# Allegro board QUADCOPTER1brd3_1.brd
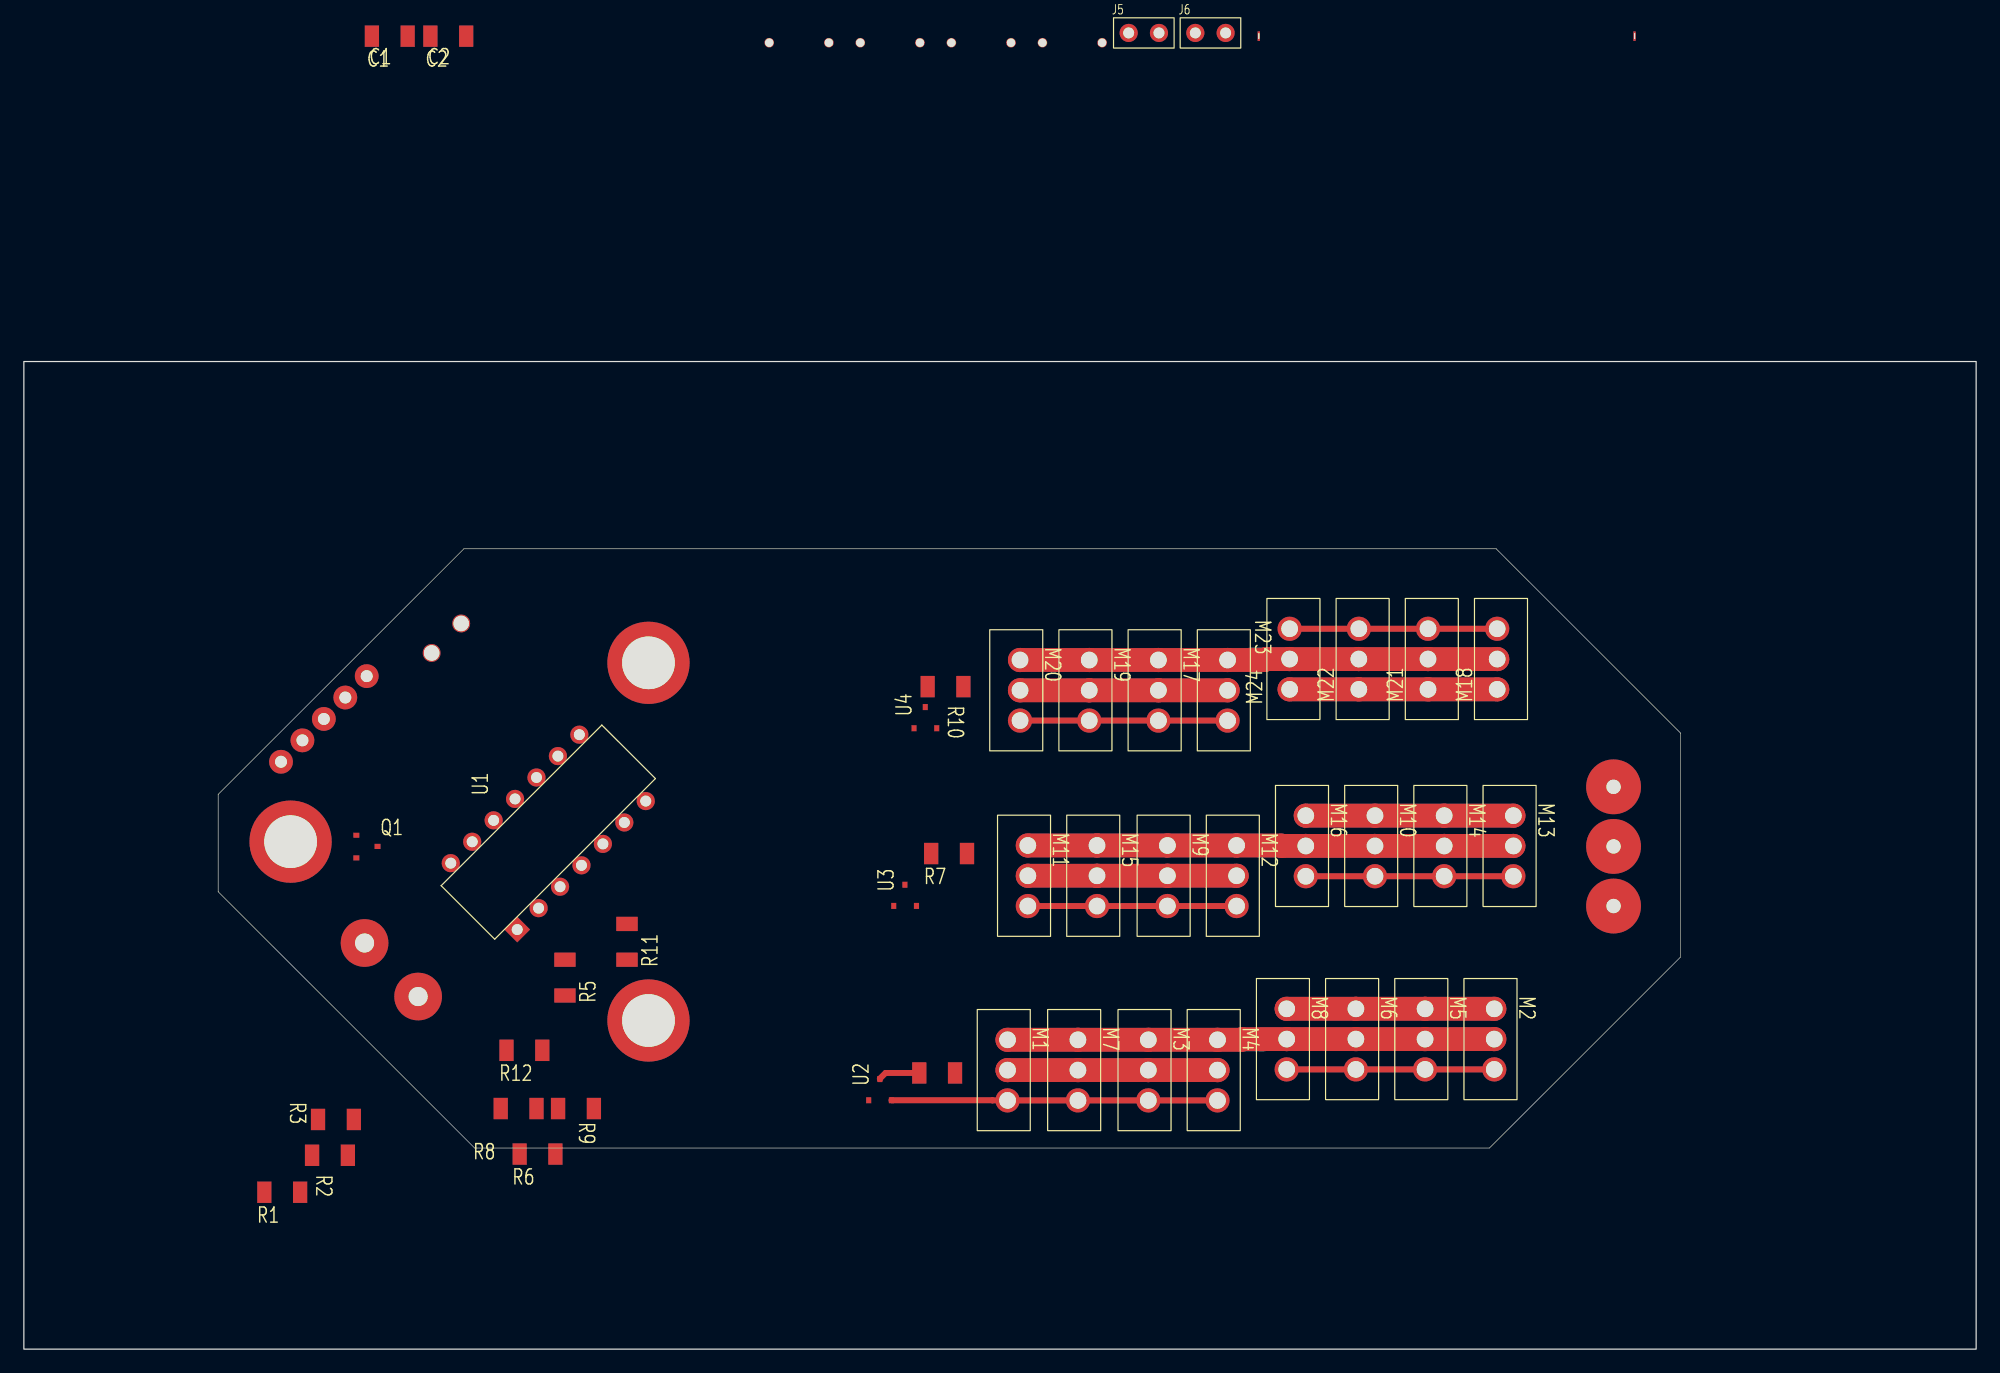
[diagram p0: board, top side]
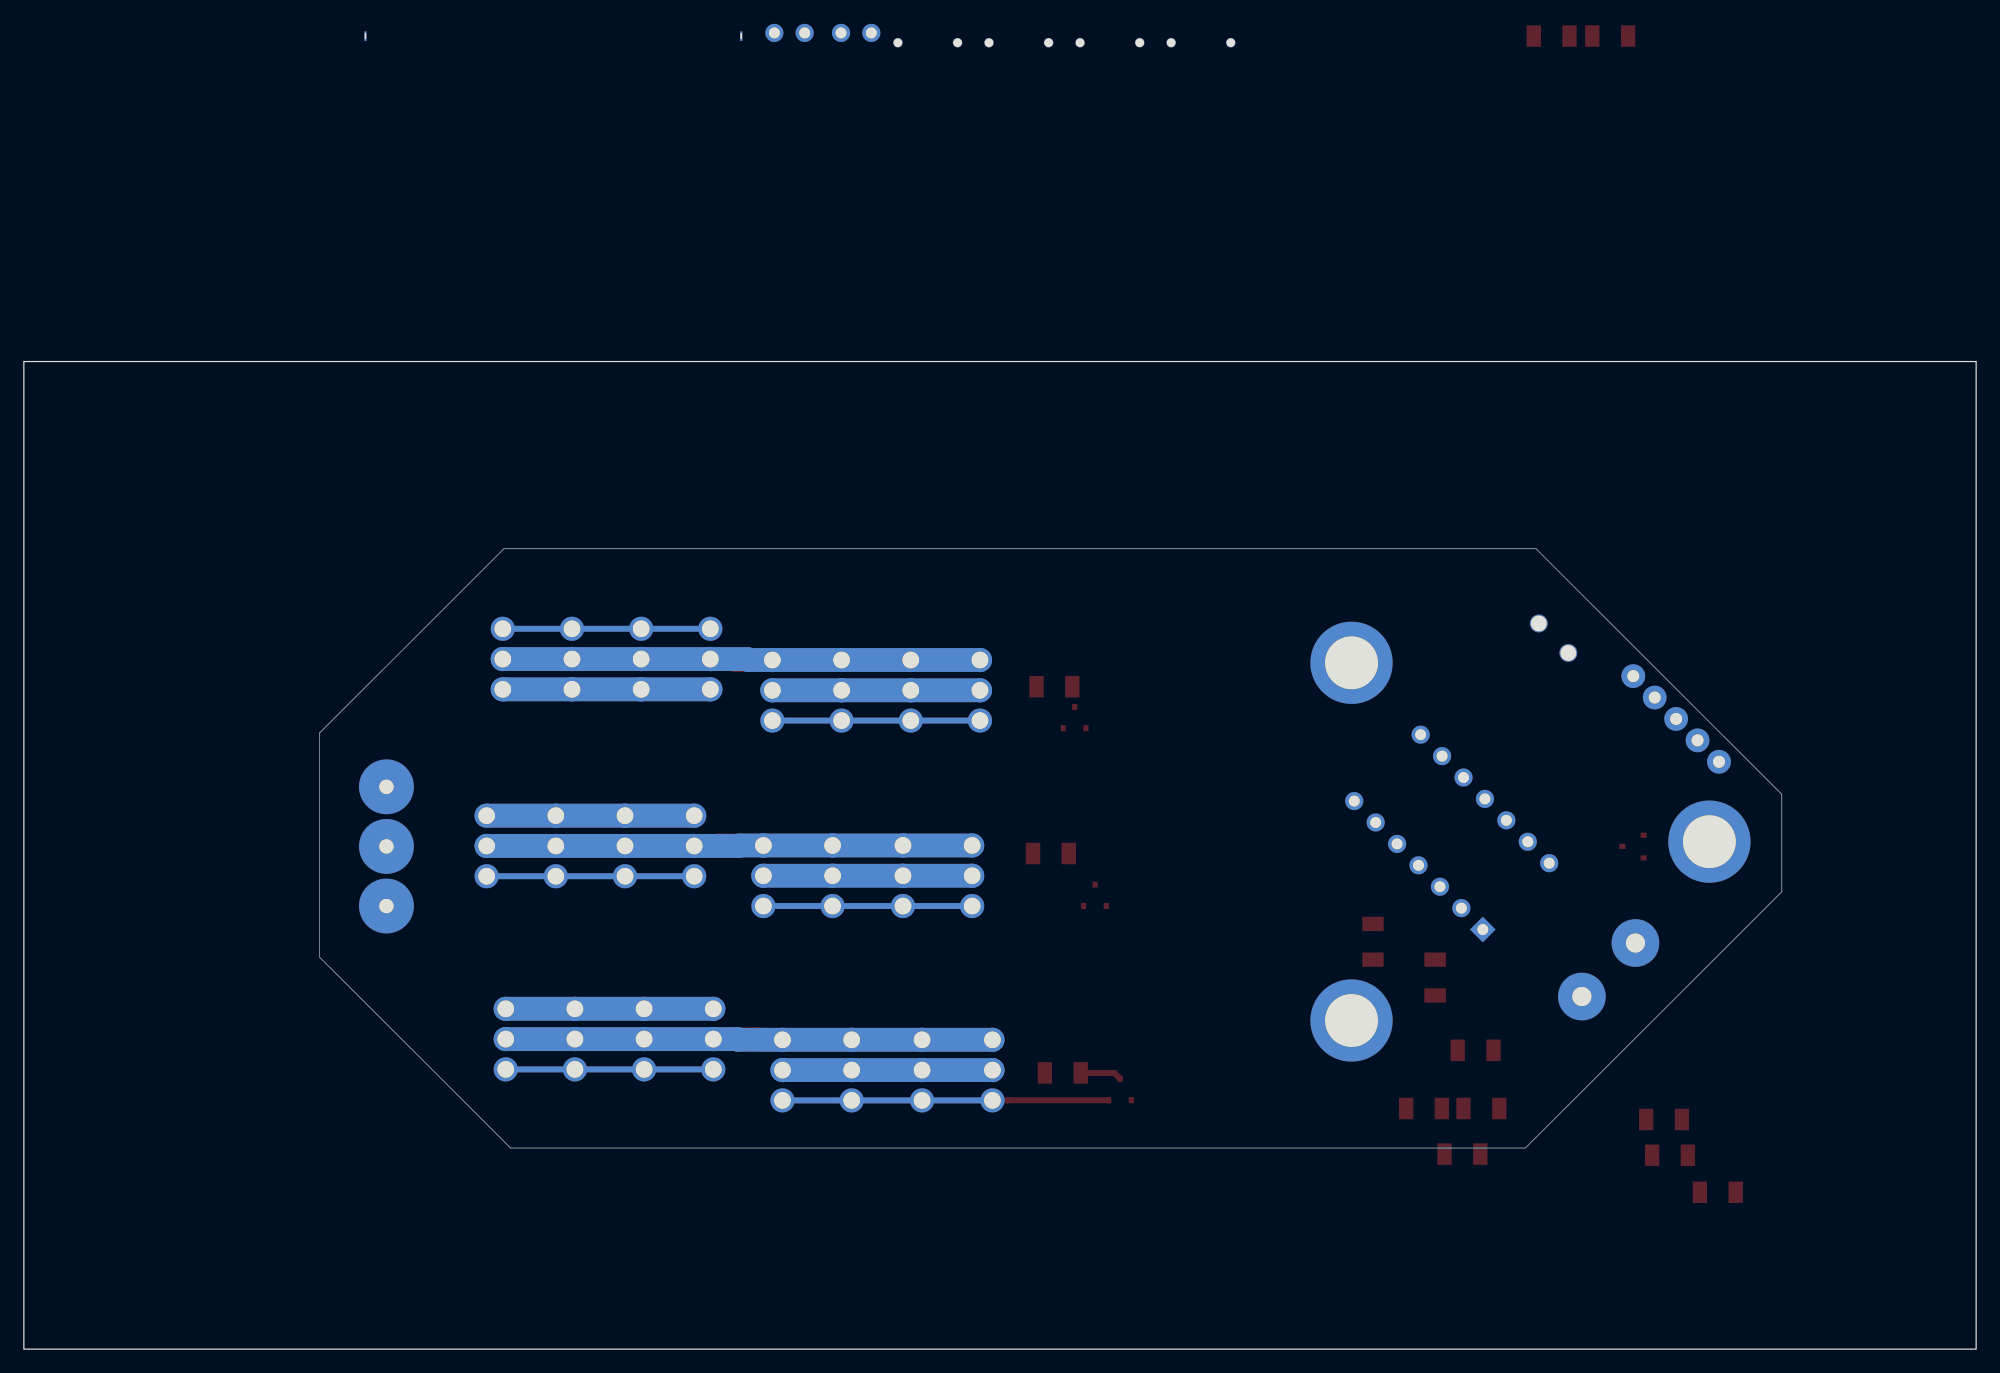
[diagram p1: board, bottom side, seen from below]

Outline 163.65 x 82.83 mm; copper layers: TOP, BOTTOM. Coordinates in mm from the lower left corner of the outline.
Outline path: rectangle 0,0 163.65,82.83 ; 16.29,46.53 16.29,38.36 37.78,16.87 122.86,16.87 138.86,32.88 138.86,51.68 123.42,67.13 36.89,67.13 16.29,46.53

## Placement (name value [footprint] x y rotation side)
C1  1uF  [SMD_CAP_1206]  30.67 110.12 0 top
C2  1uF  [SMD_CAP_1206]  35.58 110.12 0 top
C3  100uF  [CAP250]  82.39 106.57 0 top
C4  100uF  [CAP250]  74.75 106.57 0 top
C5  100uF  [CAP250]  59.48 106.57 0 top
C6  100uF  [CAP250]  67.12 106.57 0 top
F1  FUSE  [FUSECLIP]  83.52 90.12 0 top
J1  CON2  [KDCONN2]  28.56 34.06 315 top
J2  CON2  [KDCONN2_2]  36.66 60.86 225 top
J4  CON5  [CONN5]  19.76 49.26 315 top
J5  JUMPER  [JUMPER2]  92.61 110.39 0 top
J6  JUMPER  [JUMPER2]  98.2 110.39 0 top
J7  CON3  [ED1362]  135.76 34.66 90 top
M1  IRF9Z34N  [TO220AB]  82.46 20.86 270 top
M2  IRFZ34N  [TO220AB]  123.26 23.46 270 top
M3  IRF9Z34N  [TO220AB]  94.26 20.86 270 top
M4  IRF9Z34N  [TO220AB]  100.06 20.86 270 top
M5  IRFZ34N  [TO220AB]  117.46 23.46 270 top
M6  IRFZ34N  [TO220AB]  111.66 23.46 270 top
M7  IRF9Z34N  [TO220AB]  88.36 20.86 270 top
M8  IRFZ34N  [TO220AB]  105.86 23.46 270 top
M9  IRF9Z34N  [TO220AB]  95.86 37.16 270 top
M10  IRFZ34N  [TO220AB]  113.26 39.66 270 top
M11  IRF9Z34N  [TO220AB]  84.16 37.16 270 top
M12  IRF9Z34N  [TO220AB]  101.66 37.16 270 top
M13  IRFZ34N  [TO220AB]  124.86 39.66 270 top
M14  IRFZ34N  [TO220AB]  119.06 39.66 270 top
M15  IRF9Z34N  [TO220AB]  89.96 37.16 270 top
M16  IRFZ34N  [TO220AB]  107.46 39.66 270 top
M17  IRF9Z34N  [TO220AB]  95.11 52.72 270 top
M18  IRFZ34N  [TO220AB]  123.51 60.42 90 top
M19  IRF9Z34N  [TO220AB]  89.31 52.72 270 top
M20  IRF9Z34N  [TO220AB]  83.51 52.72 270 top
M21  IRFZ34N  [TO220AB]  117.71 60.42 90 top
M22  IRFZ34N  [TO220AB]  111.91 60.42 90 top
M23  IRF9Z34N  [TO220AB]  100.91 52.72 270 top
M24  IRFZ34N  [TO220AB]  106.11 60.42 90 top
NOREF  -  [unnamed]  52.36 27.56 0 top
NOREF#2  -  [unnamed]  22.36 42.56 0 top
NOREF#3  -  [unnamed]  52.36 57.56 0 top
Q1  Diodes_AP1117T50L-U  [SOT23]  28.76 42.16 0 top
R1  10k  [SMD_RES_1206]  21.66 13.16 0 top
R2  10k  [SMD_RES_1206]  25.66 16.26 0 top
R3  10k  [SMD_RES_1206]  26.16 19.26 0 top
R4  10k  [SMD_RES_1206]  76.56 23.16 0 top
R5  10k  [SMD_RES_1206]  45.36 31.16 90 top
R6  10k  [SMD_RES_1206]  43.06 16.36 0 top
R7  10k  [SMD_RES_1206]  77.56 41.56 0 top
R8  10k  [SMD_RES_1206]  41.47 20.18 0 top
R9  10k  [SMD_RES_1206]  46.28 20.18 0 top
R10  10k  [SMD_RES_1206]  77.26 55.56 0 top
R11  10k  [SMD_RES_1206]  50.56 34.16 90 top
R12  10k  [SMD_RES_1206]  41.96 25.06 0 top
U1  PIC16F1503  [PIC16FL1503]  43.96 43.36 135 top
U2  2N7002  [SOT23]  71.76 21.76 90 top
U3  2N7002  [SOT23]  73.86 38.06 90 top
U4  2N7002  [SOT23]  75.56 52.96 90 top

## Library data of the parts
C1-C6 = CAP
F1 = FUSE
J1 J2 = CON2
J4 = CON5
J5 J6 = JUMPER: User Part Number: ***
J7 = CON3
M1 M3 M4 M7 M9 M11 M12 M15 M17 M19 M20 M23 = IRF9Z34N
M2 M5 M6 M8 M10 M13 M14 M16 M18 M21 M22 M24 = IRFZ34N
Q1 = Diodes_AP1117T50L-U_1
R1-R12 = R
U1 = PIC16LF1503_4
U2-U4 = 2N7002_1

## Footprints (pads in the part's own frame, mm; a bottom-side part is the same pattern mirrored in y, then rotated)
CAP250
  round 0.8 hole 0.7: 1(3,3) 2(8,3)
CONN5
  round 2 hole 1: 1(1.27,11.43) 2(1.27,8.89) 3(1.27,6.35) 4(1.27,3.81) 5(1.27,1.27)
ED1362
  round 4.6 hole 1.2: 1(2.5,2.5) 2(7.5,2.5) 3(12.5,2.5)
FUSECLIP
  rect 0.2x0.8 hole 0.1x0.5: 1(20,20) 2(51.5,20)
JUMPER2
  round 1.524 hole 0.914: 1(0,0) 2(2.54,0)
KDCONN2
  round 4 hole 1.6: 1(0,0) 2(6.35,0)
KDCONN2_2
  round 1.5 hole 1.3: 1(0,0) 2(3.5,0)
PIC16FL1503
  rect 1.524x1.524 hole 0.914: 1(-3.937,7.62)
  round 1.524 hole 0.914: 2(-3.937,5.08) 3(-3.937,2.54) 4(-3.937,0) 5(-3.937,-2.54) 6(-3.937,-5.08) 7(-3.937,-7.62) 8(3.937,-7.62) 9(3.937,-5.08) 10(3.937,-2.54) 11(3.937,0) 12(3.937,2.54) 13(3.937,5.08) 14(3.937,7.62)
SMD_CAP_1206
  rect 1.2x1.8 smd: 1(-1.5,0) 2(1.5,0)
SMD_RES_1206
  rect 1.2x1.8 smd: 1(-1.5,0) 2(1.5,0)
SOT23
  rect 0.508x0.432 smd: 1(-0.889,0.94) 2(-0.889,-0.965) 3(0.889,0)
TO220AB
  round 2.032 hole 1.397: 1(0,0) 2(-2.54,0) 3(-5.08,0)
unnamed
  round 6.9 hole 4.42: (0,0)

## Nets
12V: C1.1 C3.1 C4.1 C5.1 C6.1 F1.2 M1.2(D) M3.2(D) M4.2(D) M7.2(D) Q1.3(VIN) R4.2
12V_170153: M9.2(D) M11.2(D) M12.2(D) M15.2(D) M17.2(D) M19.2(D) M20.2(D) M23.2(D) R7.2 R10.2
0: C1.2 C2.2 C3.2 C4.2 C5.2 C6.2 J1.2 J4.3 M2.3(S) M5.3(S) M6.3(S) M8.3(S) M10.3(S) M13.3(S) M14.3(S) M16.3(S) M18.3(S) M21.3(S) M22.3(S) M24.3(S) Q1.1(GND) R2.1 R3.1 R5.1 R6.1 R8.1 R9.1 R11.1 R12.1 U1.14(VSS)
A: J7.1 M1.3(S) M2.2(D) M3.3(S) M4.3(S) M5.2(D) M6.2(D) M7.3(S) M8.2(D)
ADDR0: J4.2 J5.2 R3.2 U1.13(ICSPDAT/ADDR0)
ADDR1: J4.1 J6.2 R2.2 U1.12(ICSPCLK/ADDR1)
AHIGH: R5.2 U1.3(RA4) U2.1(GATE)
ALOW: M2.1(G) M5.1(G) M6.1(G) M8.1(G) R6.2 U1.2(RA5)
B: J7.2 M9.3(S) M10.2(D) M11.3(S) M12.3(S) M13.2(D) M14.2(D) M15.3(S) M16.2(D)
BHIGH: R8.2 U1.5(RC5) U3.1(GATE)
BLOW: M10.1(G) M13.1(G) M14.1(G) M16.1(G) R9.2 U1.6(RC4)
C: J7.3 M17.3(S) M18.2(D) M19.3(S) M20.3(S) M21.2(D) M22.2(D) M23.3(S) M24.2(D)
CHIGH: R11.2 U1.7(RC3) U4.1(GATE)
CLOW: M18.1(G) M21.1(G) M22.1(G) M24.1(G) R12.2 U1.8(RC2)
NMCLR: J4.4 R1.1 U1.4(NMCLR)
SCL: J2.2 U1.10(SCL)
SDA: J2.1 U1.9(SDA)
VEXT: C2.1 J4.5 J5.1 J6.1 Q1.2(VOUT) R1.2 U1.1(VDD)
N76044: F1.1 J1.1
N163953: M1.1(G) M3.1(G) M4.1(G) M7.1(G) U2.2(SOURCE)
N170087: M9.1(G) M11.1(G) M12.1(G) M15.1(G) U3.2(SOURCE)
N171446: M17.1(G) M19.1(G) M20.1(G) M23.1(G) U4.2(SOURCE)
N1635110: R4.1 U2.3(DRAIN)
N1701930: R7.1 U3.3(DRAIN)
N1715520: R10.1 U4.3(DRAIN)

Pads without a net: U1 11

## Routing (per net, layer and track width the routed paths; a pad name or vN(x,y) marks a point on that pad's centre or on a via; arc(x,y) is an arc through that point)
12V: length 35.2
  TOP w2: M4.2 M3.2 M7.2 M1.2
  BOTTOM w2: M4.2 M3.2 M7.2 M1.2
12V_170153: length 69.8
  TOP w2: M12.2 M9.2 M15.2 M11.2 ; M20.2 M19.2 M17.2 M23.2
  BOTTOM w2: M12.2 M9.2 M15.2 M11.2 ; M23.2 M17.2 M19.2 M20.2
0: length 104.4
  TOP w2: M16.3 M10.3 M14.3 M13.3 ; M8.3 M6.3 M5.3 M2.3 ; M24.3 M22.3 M21.3 M18.3
  BOTTOM w2: M8.3 M6.3 M5.3 M2.3 ; M18.3 M21.3 M22.3 M24.3 ; M13.3 M14.3 M10.3 M16.3
A: length 81.6
  TOP w2: M2.2 M5.2 M6.2 M8.2 102.14,26 102.08,25.94 M4.3 M3.3 M7.3 M1.3
  BOTTOM w2: M2.2 M5.2 M6.2 M8.2 103.84,26 103.78,25.94 M4.3 M3.3 M7.3 M1.3
ALOW: length 34.8
  TOP w0.5: M8.1 M6.1 M5.1 M2.1
  BOTTOM w0.5: M2.1 M5.1 M6.1 M8.1
B: length 81.4
  TOP w2: M11.3 M15.3 M9.3 M12.3 105.4,42.24 105.44,42.2 M16.2 M10.2 M14.2 M13.2
  BOTTOM w2: M13.2 M14.2 M10.2 M16.2 103.72,42.2 103.68,42.24 M12.3 M9.3 M15.3 M11.3
BLOW: length 34.8
  TOP w0.5: M13.1 M14.1 M10.1 M16.1
  BOTTOM w0.5: M16.1 M10.1 M14.1 M13.1
C: length 80.1
  TOP w2: M18.2 M21.2 M22.2 M24.2 104.09,57.88 104.01,57.8 M23.3 M17.3 M19.3 M20.3
  BOTTOM w2: M18.2 M21.2 M22.2 M24.2 103,57.88 102.92,57.8 M23.3 M17.3 M19.3 M20.3
CLOW: length 34.8
  TOP w0.5: M18.1 M21.1 M22.1 M24.1
  BOTTOM w0.5: M18.1 M21.1 M22.1 M24.1
N163953: length 44.9
  TOP w0.5: M4.1 M3.1 M7.1 M1.1 81.19,20.86 81.18,20.88 U2.2
  BOTTOM w0.5: M4.1 M3.1 M7.1 M1.1
N170087: length 35
  TOP w0.5: M11.1 M15.1 M9.1 M12.1
  BOTTOM w0.5: M11.1 M15.1 M9.1 M12.1
N171446: length 34.8
  TOP w0.5: M23.1 M17.1 M19.1 M20.1
  BOTTOM w0.5: M23.1 M17.1 M19.1 M20.1
N1635110: length 3.5
  TOP w0.5: U2.3 71.76,22.69 72.23,23.16 R4.1
